# Altium PCB Power.PcbDoc
Units mil, origin at the board's own origin, x right, y up, seen from the top; angles counter-clockwise.
Board outline 1220.47 x 2874.02 mil, 2 copper layers (Top Layer, Bottom Layer), stack 21 mil thick; 48 components, 32 nets, 128 pads, 221 vias.
Unrouted connection lines stored in the file: 51.
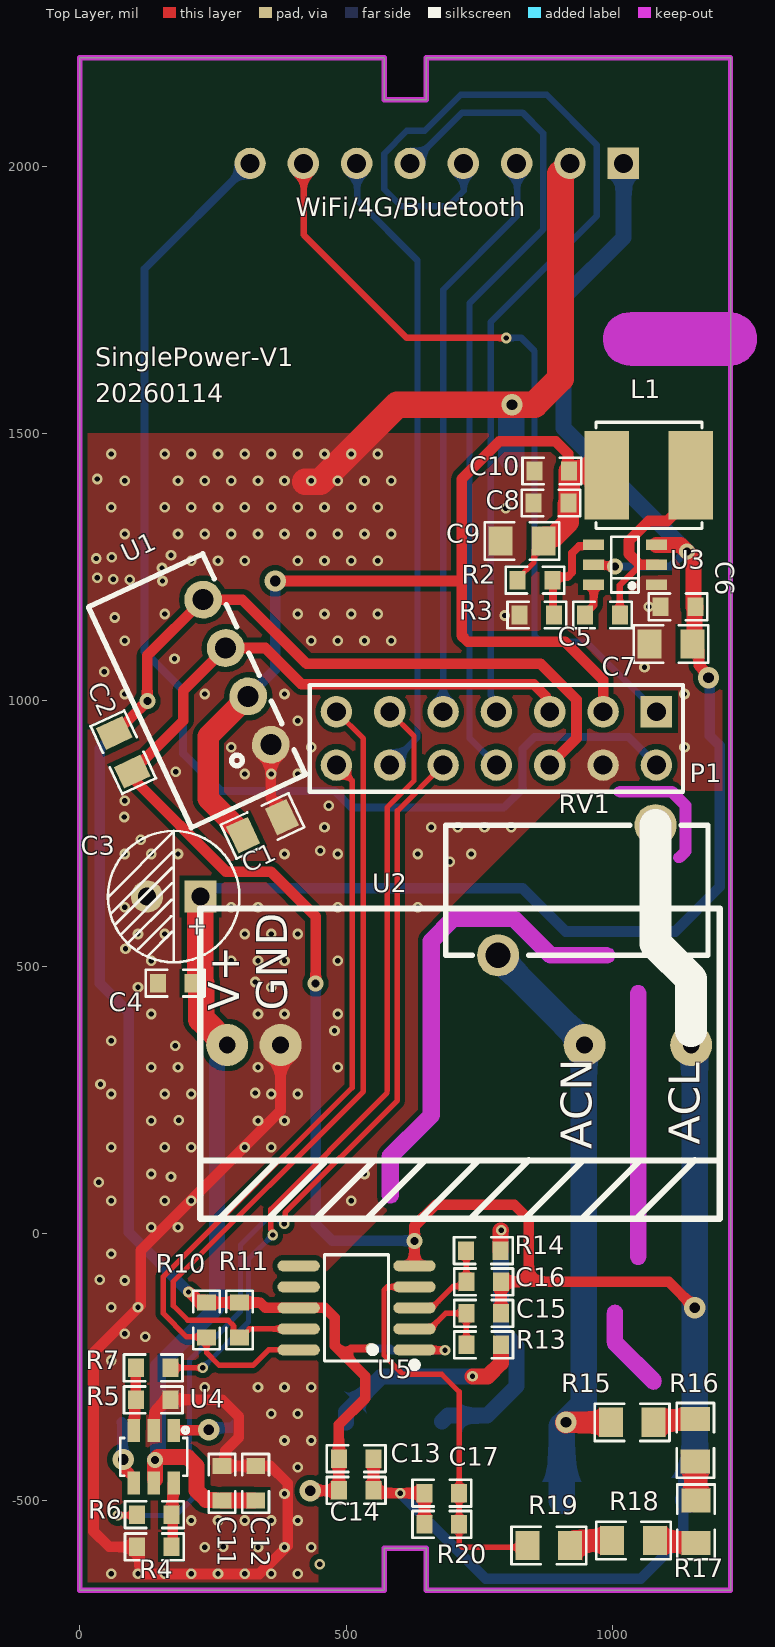
[diagram p0: Top Layer view]
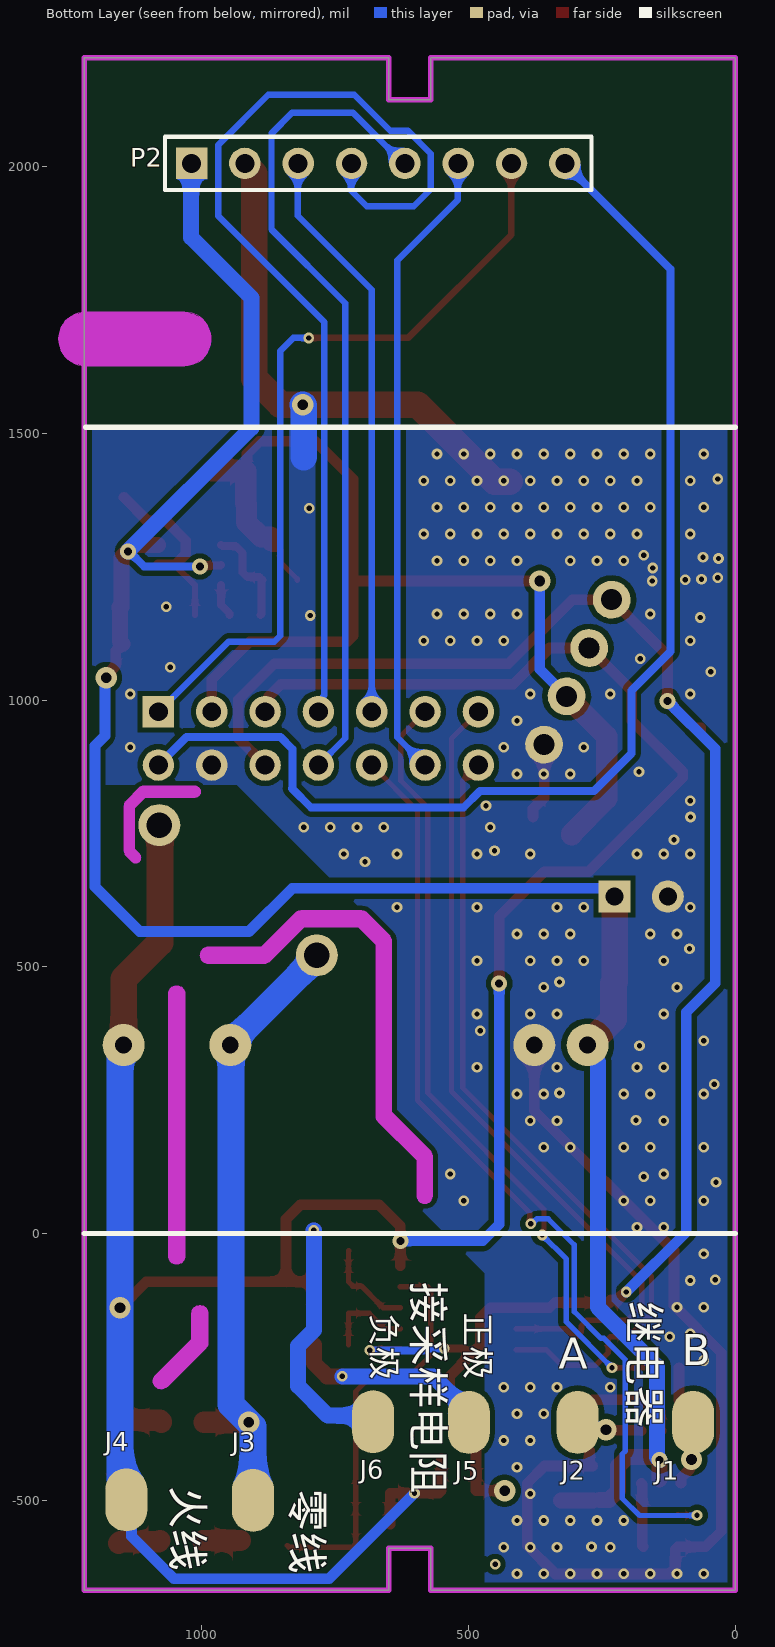
[diagram p1: Bottom Layer view, seen from below]

## Layer stack, top to bottom
Top Solder: solder mask 0.4, Solder Resist, Dk 3.5
Top Layer: signal copper 1.4
Dielectric 2: prepreg 2.8, Composite dielectric, Dk 4.1
Dielectric 1: prepreg 12.6, Composite dielectric, Dk 4.1
Dielectric 3: prepreg 2.8, Composite dielectric, Dk 4.1
Bottom Layer: signal copper 1.4
Bottom Solder: solder mask 0.4, Solder Resist, Dk 3.5

## Board outline
0,-669.29 0,2204.72 570.87,2204.72 570.87,2125.98 649.61,2125.98 649.61,2204.72 1220.47,2204.72 1220.47,-669.29 649.61,-669.29 649.61,-590.55 570.87,-590.55 570.87,-669.29
cut-out: 1032.48,1627.22 cw(c1032.48,1677.23) 1032.48,1727.25 1219.01,1727.25 cw(c1219.01,1677.23) 1269.02,1677.23 cw(c1219.01,1677.23) 1219.01,1627.22
cut-out: 567.17,71.31 567.17,144.13 cw(c582.18,144.13) 571.58,154.76 571.56,154.75 644.25,227.44 644.25,548.67 cw(c659.27,548.67) 648.66,559.3 648.65,559.29 689.62,600.26 689.61,600.25 cw(c700.24,589.64) 700.24,604.66 814.69,604.66 cw(c814.69,589.64) 825.32,600.25 825.31,600.26 889.11,536.46 988.56,536.46 cw(c988.56,521.44) 1003.57,521.44 cw(c988.56,521.44) 988.56,506.43 882.89,506.43 cw(c882.89,521.44) 872.26,510.84 872.28,510.82 808.47,574.63 706.46,574.63 674.28,542.45 674.28,221.22 cw(c659.27,221.22) 669.87,210.59 669.88,210.6 597.19,137.91 597.19,71.31 cw(c582.18,71.31)
cut-out: 1124.18,694.8 cw(c1124.18,704.82) 1118.61,713.14 1126.16,720.68 1126.16,798.25 1106.2,818.21 1012.22,818.21 cw(c1012.22,828.23) 1012.22,838.24 1110.34,838.24 cw(c1110.34,828.23) 1117.43,835.31 1143.25,809.48 cw(c1136.17,802.4) 1146.19,802.4 1146.19,716.53 cw(c1136.17,716.53) 1143.25,709.45 1131.54,697.73 cw(c1124.45,704.82) 1124.45,694.8
cut-out: 1032.29,-43.1 ccw(c1047.3,-43.1) 1062.32,-43.1 1062.32,449.84 ccw(c1047.3,449.84) 1032.29,449.84
cut-out: 988.7,-204.62 ccw(c1003.72,-204.62) 993.11,-215.25 993.1,-215.24 1065.45,-287.59 ccw(c1076.06,-276.97) 1091.08,-276.97 ccw(c1076.06,-276.97) 1086.68,-266.35 1018.73,-198.4 1018.73,-149.81 ccw(c1003.72,-149.81) 988.7,-149.81

## Design rules (kind name [scope] priority, off if disabled: settings)
Clearance "Via to pad" [IsVia vs IsPad] p1: gap=10 ignorepadtopadclearanceinfootprint=FALSE
Clearance Ploy [InPoly] p2: gap=10 ignorepadtopadclearanceinfootprint=FALSE
Clearance "Track to pad" [IsTrack vs IsPad] p3: gap=8 ignorepadtopadclearanceinfootprint=FALSE
Clearance "Track to track" [IsTrack vs IsTrack] p4: gap=5 ignorepadtopadclearanceinfootprint=FALSE
Clearance "Via to Track" [IsVia vs IsTrack] p5: gap=10 ignorepadtopadclearanceinfootprint=FALSE
Clearance "Via To Via" [IsVia vs IsVia] p6: gap=10 ignorepadtopadclearanceinfootprint=FALSE
ComponentClearance [All] p1: gap=0 collisioncheckmode=3 verticalgap=0 showdistances=FALSE
DiffPairsRouting [All] p1: maxlimit=10 minlimit=7 mostfreqgap=7 toplayer_minwidth=5 toplayer_maxwidth=100 toplayer_prefwidth=7 bottomlayer_minwidth=5 bottomlayer_maxwidth=100 bottomlayer_prefwidth=7 maxuncoupledlength=500
HoleSize [All] p1: absolutevalues=TRUE maxlimit=200 minlimit=1 maxpercent=80.000 minpercent=20.000
HoleToHoleClearance [All] p1: gap=5 allowstackedmicrovias=TRUE
MinimumSolderMaskSliver [All] p1: minsoldermaskwidth=0
PolygonConnect [All vs (InPadClass('All Pads'))] p1: connectstyle=Direct reliefconductorwidth=10 reliefentries=4 polygonreliefangle="90 Angle" airgapwidth=10
PolygonConnect GND焊盘 [InNet('GND_1') vs (InPadClass('All Pads'))] p2: connectstyle=Relief reliefconductorwidth=10 reliefentries=4 polygonreliefangle="90 Angle" airgapwidth=10
PolygonConnect GND过孔 [All vs IsVia] p3: connectstyle=Direct reliefconductorwidth=10 reliefentries=4 polygonreliefangle="90 Angle" airgapwidth=10
RoutingVias RoutingVias_1 [InNet('AGND_1')] p1: holewidth=10 width=20 viastyle="Through Hole" minholewidth=10 minwidth=20 maxholewidth=28 maxwidth=50
RoutingVias [All] p2: holewidth=10 width=20 viastyle="Through Hole" minholewidth=10 minwidth=20 maxholewidth=28 maxwidth=50
SilkToSilkClearance [All] p1: silktosilkclearance=0
SilkToSolderMaskClearance [IsPad] p1: minsilkscreentomaskgap=0 clearancetoexposedcopper=TRUE
SolderMaskExpansion [All] p1: expansion=1 istentingtop=FALSE
Width [All] p1: maxlimit=300 minlimit=5 preferedwidth=7 minimp=50.000000 maximp=50.000000 favimp=50.000000
23 further rules are at their usual default settings.

## Classes and differential pairs
component class 连接: P1 P2
component class 继电器: C11 C12 J1 J2 R4 R5 R6 R7 U4
component class Power: C3 C4 C5 C6 C7 C8 C9 C10 L1 R2 R3 U2 U3
component class 计量: C1 C2 C13 C14 C15 C16 C17 J3 J4 J5 J6 R10 R11 R13 R14 R15 R16 R17 R18 R19 R20 U1 U5

## Components (designator, comment, footprint, x,y, rotation, side; value= is the part's Value field where it differs from the comment)
C1 "4.7uF/25V" 0805R 306.58,746.97 r25 top
C2 "10uF/25V" 0805R 64.81,938.5 r295 top
C3 "100uF/25V" CAPPIND06 226.33,631.7 r180 top
C4 "104/25V" 0603R 146.72,469.16 r0 top
C5 "104/25V" 0603R 1012.91,1159.72 r180 top
C6 "10uF/25V" 0603R 1089.61,1174.81 r0 top
C7 "22uF/25V" 0805R 1148.88,1105.36 r180 top
C8 "10uF/25V" 0603R 851.35,1369.54 r0 top
C9 "47uF/10V" 0805R 869.59,1298.28 r180 top
C10 "104/10V" 0603R 852.99,1429.65 r0 top
C11 "22uF/25V" 0603R 266.89,-435.99 r270 top
C12 "104/25V" 0603R 330.17,-435.99 r270 top
C13 "104/25V" 0603R 551.09,-422.5 r180 top
C14 "10uF/25V" 0603R 551.09,-481.76 r180 top
C15 "68nF/10V" 0603R 725.1,-149.81 r0 top
C16 "68nF/10V" 0603R 725.1,-90.67 r0 top
C17 "10nF/10V" 0603R 711.6,-487.03 r180 top
J1 "J1" 贴片焊盘V1（3*2椭圆） 78.74,-354.33 r270 bottom
J2 "J1" 贴片焊盘V1（3*2椭圆） 295.28,-354.33 r270 bottom
J3 "J1" 贴片焊盘V1（3*2椭圆） 904.13,-500.7 r270 bottom
J4 "J1" 贴片焊盘V1（3*2椭圆） 1141.73,-499.72 r270 bottom
J5 "J1" 贴片焊盘V1（3*2椭圆） 499.45,-354.33 r90 bottom locked
J6 "J1" 贴片焊盘V1（3*2椭圆） 679,-353 r270 bottom locked
L1 "4.7uH/3A" 贴片电感5020 1146.16,1421.51 r0 top
P1 "Header 7X2" HDR2X7 1081.52,978.23 r180 top
P2 "Header 8" HDR1X8 1019.45,2006.38 r180 bottom
R2 "40.2K" 0603R 821.36,1225.04 r0 top
R3 "12K" 0603R 889.66,1159.72 r180 top
R4 "4.7K/5%" 0603R 107.46,-587.82 r0 top
R5 "4.7K/5%" 0603R 170.5,-311.98 r180 top
R6 "100R/5%" 0603r 107.45,-527.5 r0 top
R7 "100R/5%" 0603R 105.5,-251.97 r0 top
R10 "2K/5%/0603" 0603R 237.73,-194.78 r90 top
R11 "2K/5%/0603" 0603R 299.83,-194.78 r90 top
R13 "510R/1%" 0603R 790.1,-208.86 r180 top
R14 "510R/1%" 0603R 789.57,-32.38 r180 top
R15 "390K" 0805R 1076.06,-354.33 r180 top
R16 "390K" 0805R 1154.51,-428.09 r90 top
R17 "390K" 0805R 1155.81,-580.7 r90 top
R18 "390K" 0805R 998.58,-575.7 r0 top
R19 "390K" 0805R 839.83,-585.22 r0 top
R20 "510R/1%" 0603R 646.6,-545.57 r0 top
RV1 "7S561K" 10D821K 932.24,643.49 r0 top
U1 "B0303S" B1205S-1WR3 1005.71,-606.96 r115 top
U2 "X1071    90-240V" X1071 1146.8,353.29 r180 top locked
U3 "DIO6930" SOT-23-6DBV 1081.98,1216.31 r90 top
U4 "BL8023FCBT6R" SOT-23-6 176.33,-369.85 r180 top
U5 "BL0942" BL0942-10pin 627.79,-218.29 r90 top

## Footprints (in the part's own frame and the unit in brackets; to place one, negate y for a bottom-side part, rotate by r counter-clockwise, add the part's x,y. Pads: shape width x height; smd on the part's side, far side on the other; paste and mask are expansions set on the pad)
10D821K [mm]
  round 2 hole 1.2 copper offset 0,0: 1(-3.75,-3.1) 2(3.75,3.1)
  silkscreen extent -6.25,-3.1 6.25,3.1
0603R [mil]
  rect 30x35 smd: 1(0,0) 2(65,0)
  silkscreen extent -22,-25 88,25
0603r [mil]
  rect 30x35 smd: 1(0,0) 2(65,0)
  silkscreen extent -22,-25 88,25
0805R [mil]
  rect 45x55 smd: 1(0,0) 2(80,0)
  silkscreen extent -30,-35 110,35
B1205S-1WR3 [mm]
  round 1.8 hole 1: 1(42.019,-1.451) 2(44.559,-1.451) 3(47.099,-1.451) 4(49.639,-1.451)
  silkscreen extent 40.03,-2.35 51.63,3.65
BL0942-10pin [mm]
  oval 0.525x2.014 smd: 1(0,0) 2(1,0) 3(2,0) 4(3,0) 5(4,0) 6(4,5.513) 7(3,5.513) 8(2,5.513) 9(1,5.513) 10(0,5.513)
  silkscreen extent -0.86,-0.15 4.53,4.28
CAPPIND06 [mil]
  rect 60x60 hole 34: 1(0,0)
  round 60 hole 34: 2(100,0)
  silkscreen extent -73,-123 173,123
HDR1X8 [mm] "Connector; Header; 8 Position"
  rect 1.5x1.5 hole 0.9: 1(0,0)
  round 1.5 hole 0.9: 2(2.54,0) 3(5.08,0) 4(7.62,0) 5(10.16,0) 6(12.7,0) 7(15.24,0) 8(17.78,0)
  silkscreen extent -1.27,-1.27 19.05,1.27
HDR2X7 [mm] "Connector; Header; 7x2 Position"
  rect 1.5x1.5 hole 0.9: 1(0,0)
  round 1.5 hole 0.9: 2(0,2.54) 3(2.54,0) 4(2.54,2.54) 5(5.08,0) 6(5.08,2.54) 7(7.62,0) 8(7.62,2.54) 9(10.16,0) 10(10.16,2.54) 11(12.7,0) 12(12.7,2.54) 13(15.24,0) 14(15.24,2.54)
  silkscreen extent -1.27,-1.27 16.51,3.81
SOT-23-6 [mm]
  rect 0.6x1.1 smd: 1(0,0) 2(0.95,0) 3(1.9,0) 4(1.9,2.5) 5(0.95,2.5) 6(0,2.5)
  silkscreen extent -0.69,-0.15 2.55,2.15
SOT-23-6DBV [mm]
  rect 0.5x1 smd: 1(0,0) 2(0.95,0) 3(1.9,0) 4(1.9,3) 5(0.95,3) 6(0,3)
  silkscreen extent -0.37,0.86 2.29,2.16
X1071 [mm]
  round 2 hole 0.8: 1(0,0) 2(5.08,0) 4(19.56,0) 5(22.1,0)
  silkscreen extent -1.36,-6.5 23.38,8.28
贴片焊盘V1（3*2椭圆） [mm]
  oval 3x2 smd: 1(0,0)
贴片电感5020 [mm]
  rect 2.124x4.22 smd: 1(0,0) 2(-4,0)
  silkscreen extent -4.53,-2.53 0.53,2.53

## Part data
C1 C2: library part CAP+
C3 C7 C9: library part "Cap Pol1", "Polarized Capacitor (Radial)", LatestRevisionDate=17-Jul-2002, LatestRevisionNote="Re-released for DXP Platform.", PackageDescription="Polarized Capacitor (Radial); 2 Leads", PackageReference=RB7.6-15, Published=8-Jun-2000, Publisher="Altium Limited"
C4 C5 C10 C11 C12 C13 C14: library part CAP_1
C6 C8 C15 C16 C17: library part CAP
L1: library part Inductor, "Inductor", Code_IEC=1005, Code_JEITA=0402, LatestRevisionDate=29-May-2009, LatestRevisionNote="IPC-7351 Footprint Added.", PackageDescription="Chip Inductor", PackageReference=0402-A, Published=8-Jun-2000, Publisher="Altium Limited"
P1: "Header, 7-Pin, Dual row", LatestRevisionDate=17-Jul-2002, LatestRevisionNote="Re-released for DXP Platform.", Publisher="Altium Limited"
P2: "Header, 8-Pin", LatestRevisionDate=17-Jul-2002, LatestRevisionNote="Re-released for DXP Platform.", Publisher="Altium Limited"
R2 R3: library part Res2, "Resistor", LatestRevisionDate=17-Jul-2002, LatestRevisionNote="Re-released for DXP Platform.", PackageDescription="Axial Device, Thru-Hole; 2 Leads; 0.4 in Pin Spacing", PackageReference=AXIAL-0.4, Published=8-Jun-2000, Publisher="Altium Limited"
R4 R5 R6 R7 R10 R11 R13 R14 R15 R16 R17 R18 R19 R20: library part RES
RV1: library part "Res Varistor", "Varistor (Voltage-Sensitive Resistor)", Code_IPC=RESC2012, LatestRevisionDate=29-May-2009, LatestRevisionNote="IPC-7351 Footprint Added.", PackageDescription="Chip Resistor 0805 Case Size", PackageReference=6-0805, PackageVersion=Mar-2003, Published=24-Mar-1999, Publisher="Altium Limited"
U1: library part B0505S
U2: library part AD2DC_EMC
U3: library part BL8032
U4: library part BL8023HCB6TR, JLCPCB Part Class="Extended Part", LCSC Part Name="BL8023HCB6TR 继电器驱动芯片 停产", Manufacturer=BL(上海贝岭), Add into BOM=yes, Convert to PCB=yes, Datasheet=https://atta.szlcsc.com/upload/public/pdf/source/20190920/C431145_DEC39E836DB2A2F1462A8BB350F12ABB.pdf, Device=BL8023HCB6TR, Manufacturer Part=BL8023HCB6TR, Supplier=LCSC, Supplier Footprint=SOT-23-6, Supplier Part=C431145, Symbol=BL8023HCB6TR
U5: library part BL0942_C2837510, JLCPCB Part Class="Extended Part", LCSC Part Name=BL0942内置时钟免校准计量芯片, Manufacturer=BL(上海贝岭), Add into BOM=yes, Convert to PCB=yes, Datasheet=https://atta.szlcsc.com/upload/public/pdf/source/20220627/BFAD44701CA6DE9A8853C5A4834B6884.pdf, Device=BL0942_C2837510, Manufacturer Part=BL0942, Supplier=LCSC, Supplier Footprint=SSOP-10-150mil, Supplier Part=C2837510, Symbol=BL0942

## Via types
v1: diameter 20, hole 10, Top Layer to Bottom Layer, 207 vias
v2: diameter 40, hole 20, Top Layer to Bottom Layer, 8 vias
v3: diameter 30, hole 15, Top Layer to Bottom Layer, 6 vias

## Nets (pads, with @x,y where several pads share a name; then routed paths per layer and width w, separated by ;. In a path a pad name is that pad's centre, name@x,y a point inside that pad or via, vN(x,y) a via of type N, cw(c..) or ccw(c..) an arc to the next point about the centre after c; other vN are vias at no path point)
4G_MCU_RXD: P1.8 P2.5 | length 1567.2
  Bottom Layer w12: P2.5@620.24,2007.87 623.25,2007.87 717.15,2101.77 830.49,2101.77 869.59,2062.66 869.59,1882.59 730.98,1743.98 730.98,928.77 P1.8
4G_MCU_TXD: P1.7 P2.4 | length 1926.9
  Bottom Layer w12: P2.4@720.24,2007.87 720.24,1955.24 691,1926 602.74,1926 570.87,1957.87 570.87,2024.62 613.62,2067.38 646.86,2067.38 714.48,2135 875.57,2135 969.57,2041.01 969.57,1907.82 770.87,1709.13 770.87,1008.78 772.52,1007.14 772.52,987.23 P1.7
4G_Reset: P1.9 P2.3 | length 1087.1
  Bottom Layer w12: P1.9 681.52,1769.42 820.24,1908.13 P2.3@820.24,2007.87
BL0942_RXD: P1.13 R11.1 U5.9 | length 1555.8
  Top Layer w10: U5.9 318.19,-178.92 302.33,-194.78 298.24,-194.78 288.24,-184.78 288.24,-172.65 278.37,-162.79 202.85,-162.79 175.43,-135.37 175.43,-90.1 532,266.47 532,927.75 P1.13
BL0942_TXD: P1.14 R10.1 U5.10 | length 1508.8
  Top Layer w10: U5.10 354.07,-218.29 324.88,-247.48 261.75,-247.48 237.73,-223.46 237.73,-197.28 234.46,-194.01 200.72,-194.01 157,-150.29 157,-80.8 511,273.2 511,848.75 P1.14
BLE_Control: P1.12 P2.6 | length 1198.1
  Bottom Layer w12: P2.6@520.24,2007.87 520.24,1937.76 633.54,1824.46 633.54,930.24 P1.12
BLE_MCU_RXD: P1.2 P2.8 | length 2271.2
  Top Layer w15: P1.2 P1.2@1081.52,880.52
  Bottom Layer w15: P2.8 121.16,1808.09 121.16,1091.18 194.22,1018.12 194.22,900.07 264.85,829.43 478.76,829.43 509.84,798.35 795,798.35 831.09,834.44 830.49,835.04 830.49,908.49 852.63,930.64 1029.11,930.64 P1.2
BLE_MCU_TXD: P1.1 P2.7 | length 1490.5
  Top Layer w12: P2.7@420.24,2007.87 420.24,1872.31 613.4,1679.14 v1(799.66,1679.14)
  Top Layer w15: P1.1@1073.99,985.76 P1.1
  Bottom Layer w12: v1(799.66,1679.14) 828.48,1679.14 852.99,1654.63 852.99,1120.89 864.3,1109.58 950.17,1109.58 P1.1
GND: C1.2 C3.2 C4.1 C6.1 C7.2 C8.1 C9.2 C10.1 C11.1 C12.1 P1.4 P2.2 R3.2 R4.1 R5.1 U1.1 U2.4 U3.1 U4.2 | length 3298.7
  Top Layer w20: U4.2 140.74,-368.03 140.74,-334.44 155.7,-319.48 165.5,-319.48 170.5,-314.48 R5.1 267.05,-311.98 278.34,-323.27 298.24,-343.17 298.24,-382.54 273.3,-407.48 273.3,-430.99 268.3,-435.99 C11.1 ; C11.1@269.39,-435.99 C12.1 357.67,-435.99 390.02,-468.34 390.02,-585.7 337.02,-638.7 124.17,-638.7 112.46,-626.99 112.46,-592.82 R4.1 55.54,-587.82 26,-558.28 26,-223.53 114.7,-134.84 114.7,-32.13 376.72,229.89 U2.4 ; U1.1@358.35,929.2 U1.1 358.35,817.08 379.08,796.35 C1.2
  Top Layer w50: 423.02,1409.67 451.16,1409.67 595.64,1554.15 852.99,1554.15 901.72,1602.89 901.72,1986.91 920.24,2005.42 P2.2@920.24,2007.87
  Bottom Layer w50: 809.27,1455.97 809.27,1552.62 v2(810.8,1554.15)
  other v1: 59.27,-638.44 109.27,-638.44 159.27,-638.44 209.27,-638.44 259.27,-638.44 309.27,-638.44 359.27,-638.44 409.27,-638.44 234.27,-588.44 334.27,-588.44 384.27,-588.44 434.27,-588.44 269.39,-587.82 209.27,-538.44 259.27,-538.44 309.27,-538.44 359.27,-538.44 409.27,-538.44 384.27,-488.44 409.27,-438.44 384.27,-388.44 434.27,-388.44 359.27,-338.44 409.27,-338.44 234.27,-288.44 334.27,-288.44 384.27,-288.44 434.27,-288.44 59.27,-238.44 123,-194.01 84.27,-188.44 59.27,-138.44 109.27,-138.44 84.27,-88.44 37.39,-87.04 59.27,-38.44 134.27,11.56 184.27,11.56 59.27,61.56 159.27,61.56 209.27,61.56 509.27,61.56 36,96 171.33,106 134.27,111.56 534.27,111.56 59.27,161.56 159.27,161.56 209.27,161.56 309.27,161.56 359.27,161.56 134.27,211.56 186,212 334.27,211.56 384.27,211.56 59.27,261.56 159.27,261.56 209.27,261.56 359.27,261.56 409.27,261.56 329.35,263.2 39.02,279.55 134.27,311.56 184.27,311.56 334.27,311.56 484.27,311.56 179.56,351.95 59.27,361.56 477.88,380 134.27,411.56 334.27,411.56 384.27,411.56 484.27,411.56 109.27,461.56 359.27,461.56 329.35,471.32 134.27,511.56 284.27,511.56 334.27,511.56 384.27,511.56 484.27,511.56 85.84,533.7 109.27,561.56 159.27,561.56 309.27,561.56 359.27,561.56 409.27,561.56 84.27,611.56 284.27,611.56 334.27,611.56 484.27,611.56 634.27,611.56 694.07,696.93 84.27,711.56 134.27,711.56 184.27,711.56 384.27,711.56 484.27,711.56 634.27,711.56 734.27,711.56 451.21,717.45 114.7,738.4 459.27,761.56 659.27,761.56 709.27,761.56 759.27,761.56 809.27,761.56 83.86,780.78 467.37,801.93 84.27,811.56 309.27,861.56 359.27,861.56 409.27,861.56 180.35,866 284.27,911.56 434.27,911.56 1134.27,911.56 409.27,961.56 84.27,1011.56 234.27,1011.56 384.27,1011.56 1134.27,1011.56 46.12,1053.08 1059.27,1061.56 177.8,1077.65 84.27,1111.56 434.27,1111.56 484.27,1111.56 534.27,1111.56 584.27,1111.56 65.83,1155.04 796.87,1158.79 159.27,1161.56 409.27,1161.56 459.27,1161.56 509.27,1161.56 559.27,1161.56 1067.11,1174.81 155.35,1223.45 93.66,1225.42 63.08,1226.96 32.83,1229.62 154.33,1247.7 209.27,1261.56 259.27,1261.56 309.27,1261.56 409.27,1261.56 459.27,1261.56 509.27,1261.56 559.27,1261.56 31.3,1265.56 60.33,1267.9 171.33,1271.78 84.27,1311.56 184.27,1311.56 234.27,1311.56 284.27,1311.56 334.27,1311.56 384.27,1311.56 434.27,1311.56 484.27,1311.56 534.27,1311.56 584.27,1311.56 798.86,1359.75 59.27,1361.56 159.27,1361.56 209.27,1361.56 259.27,1361.56 309.27,1361.56 359.27,1361.56 409.27,1361.56 459.27,1361.56 509.27,1361.56 559.27,1361.56 84.27,1411.56 184.27,1411.56 234.27,1411.56 284.27,1411.56 334.27,1411.56 384.27,1411.56 434.27,1411.56 484.27,1411.56 534.27,1411.56 584.27,1411.56 32.83,1414.74 59.27,1461.56 159.27,1461.56 209.27,1461.56 259.27,1461.56 309.27,1461.56 359.27,1461.56 409.27,1461.56 459.27,1461.56 509.27,1461.56 559.27,1461.56
IN1: C16.1 R14.2 U5.3 | length 176.1
  Top Layer w10: U5.3 659.98,-139.55 665.31,-134.22 665.64,-134.22 700.96,-98.9 716.87,-98.9 C16.1 725.1,-87.04 725.1,-32.91 R14.2
IP1: C15.1 R13.2 U5.2 | length 170.6
  Top Layer w10: U5.2@629.33,-177.38 U5.2 657.09,-178.92 686.21,-149.81 C15.1 R13.2
Lin: C2.2 C13.1 C14.1 C15.2 C16.2 C17.2 J4.1 P1.5 R20.1 RV1.2 U1.3 U2.1 U5.5 | length 5284.8
  Top Layer w20: v3(442.49,468.9) 442.49,594.27 358.27,678.49 274.47,678.49 98.62,854.33 C2.2 194.22,961.59 194.22,1018.12 U1.3 348.14,1097.73 416.01,1029.86 851.73,1029.86 874.05,1007.54 874.05,985.7 P1.5 ; C13.1 C14.1 551.09,-482.03 556.09,-487.03 v1(601.34,-487.03) C17.2 R20.1 ; U5.5 v3(627.79,-13.9) 627.79,13.85 667.95,54 815,54 842.3,26.7 842.3,-90.67 ; C15.2 C16.2 842.3,-90.67 ; v2(1153.56,-139.68) 1104.55,-90.67 842.3,-90.67
  Top Layer w50: RV1.2 1078.56,764.22 1078.56,545.2 1146.8,476.97 U2.1
  Bottom Layer w20: v3(442.49,468.9) 442.49,17 473.39,-13.9 v3(627.79,-13.9) ; v1(601.34,-487.03) 761.74,-647.43 1052.17,-647.43 1131.91,-567.69 J4.1@1131.91,-520.6
  Bottom Layer w50: J4.1 1147.23,-494.22 1147.23,-454.21 1153.56,-447.88 1153.56,338.75 1146.8,345.52 U2.1
NetC5_1: C5.1 L1.1 U3.2 | length 340.3
  Top Layer w12: C5.1 1012.91,1215.23 1047.98,1250.3
  Top Layer w20: U3.2 1081.82,1253.87 1050.08,1253.87 1030.05,1273.9 1030.05,1299.05 1067,1336 1101.91,1336 L1.1@1146.16,1380.25
NetC5_2: C5.2 U3.6 | length 63.2
  Top Layer w15: C5.2 947.91,1162.22 963.87,1178.18 U3.6
NetJ5_1: J5.1 R13.1 | length 382.6
  Top Layer w30: v1(736.56,-268.07) 764.99,-268.07 790.1,-242.96 R13.1
  Bottom Layer w30: J5.1 499.45,-334.65 566.24,-267.86 736.35,-267.86 v1(736.56,-268.07)
NetJ6_1: J6.1 R14.1 | length 511.1
  Top Layer w30: R14.1 789.57,5.15 v1(790.35,5.93)
  Bottom Layer w30: J6.1 690.25,-341.75 763.82,-341.75 819.44,-286.13 819.44,-210.7 790.1,-181.36 790.1,5.68 v1(790.35,5.93)
NetR2_2: R2.2 R3.1 U3.4 | length 192.6
  Top Layer w15: R3.1 888.01,1161.38 888.01,1223.39 R2.2 892.29,1230.97 914.75,1230.97 923.53,1239.76 923.53,1275.64 936.67,1288.77 961.53,1288.77 U3.4
NetR4_2: R4.2 R6.2 U4.6 | length 121.2
  Top Layer w20: R4.2 174.52,-585.76 174.52,-470.08 U4.6
NetR5_2: R5.2 R7.1 U4.3 | length 119.5
  Top Layer w20: U4.3 103.33,-368.03 103.33,-314.14 R5.2 R7.1
NetR15_1: R15.1 R16.2 | length 89
  Top Layer w30: R16.2@1149.05,-351.21 1153.34,-346.92 R16.2
  Top Layer w40: R15.1 1076.06,-352.77 1078.56,-350.27 1149.92,-350.27 R16.2@1153.3,-346.89
NetR16_1: R16.1 R17.2 | length 73.1
  Top Layer w40: R16.1 1155.16,-428.74 1155.16,-500.04 R17.2
NetR17_1: R17.1 R18.2 | length 79.3
  Top Layer w40: R18.2 1081.08,-578.2 1153.31,-578.2 R17.1
NetR18_1: R18.1 R19.2 | length 70.3
  Top Layer w40: R19.2@928.31,-575.69 R18.1
Nin: J3.1 R15.2 RV1.1 U2.2 | length 1190.8
  Top Layer w40: v2@911.91,-354.83 911.75,-354.83 911.26,-354.33 R15.2
  Bottom Layer w50: RV1.1 784.6,518.46 946.8,356.26 U2.2 ; J3.1 904.13,-362.11 945.45,-320.79 U2.2@945.45,351.95
  other v2: 911.91,-354.33
Relay_C_A: P1.11 R7.2 | length 1476.5
  Top Layer w10: R7.2 v1(230.88,-251.97) ; v1(362.04,-2.98) 360.13,-1.07 360.13,6 358.44,7.68 358.44,45.18 576.46,263.2 576.46,268.5 576.6,268.64 576.6,798.35 627,848.75 627,932.75 P1.11
  Bottom Layer w10: v1(230.88,-251.97) 316.72,-166.13 316.72,-48.31 v1(362.04,-2.98)
Relay_C_B: P1.10 R6.1 | length 1800.2
  Top Layer w10: v1(71.49,-528.58) 106.37,-528.58 R6.1 ; v1(383.44,18.04) 385.36,19.95 385.36,39.11 595.64,249.39 595.64,792.34 P1.10
  Bottom Layer w10: v1(71.49,-528.58) 71.91,-529 179.56,-529 211.72,-496.84 211.72,-413.77 205.88,-407.93 205.88,-237.06 246.17,-196.76 251.61,-196.76 301.72,-146.66 301.72,-21.53 350.6,27.36 371.42,27.36 380.74,18.04 v1(383.44,18.04)
Relay_O_A: J1.1 U4.4 | length 123.4
  Top Layer w20: v2(82.01,-424.07) 85.84,-427.9 85.84,-442.74 101.52,-458.43 U4.4
  Bottom Layer w20: J1.1 80.37,-355.96 80.37,-422.44 v2(82.01,-424.07)
Relay_O_B: J2.1 U4.1 | length 125.4
  Top Layer w20: U4.1 177.11,-369.06 241.37,-369.06 v2(242.15,-368.28)
  Bottom Layer w20: v2(242.15,-368.28) 245.98,-364.46 285.15,-364.46 J2.1
VCC12: C3.1 C4.2 C6.2 C7.1 C11.2 C12.2 P2.1 U2.5 U3.3 U3.5 U4.5 | length 4233.3
  Top Layer w15: U3.5 965.45,1252.13 1002.39,1252.13 v3(1003.97,1250.55)
  Top Layer w20: C7.1 1161.38,1092.86 1161.38,1065.31 1179.17,1047.52 v2(1179.17,1042.11)
  Top Layer w30: U4.5@141.52,-461.62 141.52,-424.52 147.2,-418.84 201.84,-418.84 219.42,-436.41 219.42,-482.15 236.99,-499.72 C11.2@254.3,-499.72 ; C11.2 C12.2@326.23,-500.99 ; U3.3 1126.4,1291.12 1150.93,1266.58 C6.2@1150.93,1174.81 ; C7.1 1153.28,1109.76 1153.28,1170.98 1154.61,1172.31 C6.2
  Top Layer w50: C3.1@226.09,631.7 226.09,471.32 228.25,469.16 228.25,401.76 U2.5
  Bottom Layer w15: v3(1003.97,1250.55) 1108.19,1250.55 1136.49,1278.85 v3(1138.67,1278.85)
  Bottom Layer w20: C3.1 242,647.36 830.28,647.36 911.57,566.07 1116.55,566.07 1200.47,649.99 1200.47,914.63 1181.8,933.31 1181.8,1039.48 v2(1179.17,1042.11)
  Bottom Layer w30: v3(141.52,-424.52) 146.72,-419.32 146.72,-249.06 257.69,-138.08 257.69,321.08 276.72,340.1 U2.5 ; P2.1@1020.24,2007.87 1020.24,1867.48 907.02,1754.26 907.02,1510.5 v3(1138.67,1278.85)
VCC33: C1.1 C8.2 C9.1 C10.2 L1.2 P1.3 R2.1 U1.2 | length 2154.7
  Top Layer w10: R2.1 821.36,1227.54 852.09,1258.27 852.09,1280.78 C9.1
  Top Layer w20: v2(366.6,1223.39) 716.17,1223.39 ; 892.68,1485.54 787.36,1485.54 716.17,1414.35 716.17,1223.39 ; 894.61,1483.18 915.6,1462.19 915.6,1432.04 C10.2 ; P1.3 981.52,1038.22 910.16,1109.58 727.89,1109.58 716.17,1121.3 716.17,1223.39
  Top Layer w40: C1.1 306.58,749.38 241.08,814.88 241.08,932.09 U1.2 ; C9.1 869.59,1303.28 872.09,1305.78 888.87,1305.78 916.35,1333.26 916.35,1367.91 917.99,1369.54 C10.2 L1.2@980.53,1429.65
  Bottom Layer w20: U1.2 366.6,1057.61 v2(366.6,1223.39) ; P1.3 P1.3@988.99,985.7
VCC33_G: C2.1 C13.2 C14.2 P1.6 R10.2 R11.2 U1.4 U5.1 U5.8 | length 3432.5
  Top Layer w15: 496.09,-228.58 508.97,-215.7 v1(545.71,-215.7) ; U5.1 628.26,-218.77 684.51,-218.77 v1(684.98,-219.24)
  Top Layer w20: C2.1 64.81,948.33 77.06,948.33 v3(126.83,998.11) 126.83,1083.63 U1.4 305.18,1188.36 425.54,1068 864.3,1068 931.62,1000.68 931.62,928.33 P1.6 ; v1(204.04,-109.74) 205.55,-109.74 220.59,-124.78 232.73,-124.78 R10.2 ; R10.2@235.23,-129.78 R11.2 338.64,-129.78 348.42,-139.55 U5.8 410.86,-139.68 459.49,-139.68 478.07,-158.26 478.07,-210.55 496.09,-228.58 535.31,-267.79 535.31,-309.38 486.09,-358.6 C13.2 ; v2(432.4,-482.57) 432.81,-482.17 485.69,-482.17 C14.2 C13.2
  Bottom Layer w15: v1(545.71,-215.7) 582.18,-215.7 585.71,-219.24 v1(684.98,-219.24)
  Bottom Layer w20: v3(126.83,998.11) 37.39,908.67 37.39,468.9 91.83,414.46 91.83,2.47 v1(204.04,-109.74)
VP: C17.1 R19.1 R20.2 U5.4 | length 769
  Top Layer w10: U5.4 576.6,-100.18 570.74,-106.04 570.74,-228.43 606.66,-264.35 679,-264.35 711.6,-296.95 C17.1 R20.2 711.6,-582.75 717.46,-588.61 836.44,-588.61 R19.1
pads on no net: U5.6 U5.7
copper on no net:
  other v1: 450.2,-620.22

## Polygon pours and split planes (outlines as drawn)
GND on Bottom Layer "NONET_L-01_P-001" (solid, remove dead copper, pour order 1): -332,1511.81 1495,1511.81 1495,856 1480.77,841.77 935.08,841.77 656.13,562.82 656.13,111.67 469.73,-74.72 469.73,-689 280,-878.73 280,-912 -215,-912 -332,-795
GND on Top Layer "NONET_L-01_P-001" (solid, remove dead copper, pour order 2): -353.88,1500.13 1473.12,1500.13 1473.12,844.31 1458.9,830.09 913.2,830.09 634.25,551.14 634.25,99.99 447.86,-86.41 447.86,-700.69 258.12,-890.42 258.12,-923.69 -236.88,-923.69 -353.88,-806.69

## Keep-outs
Keep-Out Layer:
  lines w10: 0,-669.29 0,2204.72 570.87,2204.72 570.87,2125.98 649.61,2125.98 649.61,2204.72 1220.47,2204.72 1220.47,-669.29 649.61,-669.29 649.61,-590.55 570.87,-590.55 570.87,-669.29 0,-669.29
  lines w20: 1012.22,828.23 1110.34,828.23 1136.17,802.4 1136.17,716.53 1124.45,704.82 1124.18,704.82
  lines w30: 582.18,71.31 582.18,144.13 659.27,221.22 659.27,548.67 700.24,589.64 814.69,589.64 882.89,521.44 988.56,521.44 ; 1003.72,-149.81 1003.72,-204.62 1076.06,-276.97 ; 1047.3,-43.1 1047.3,449.84
  lines w100: 1032.48,1677.23 1219.01,1677.23

## Silkscreen, mask and mechanical layers (free items; w line width, h text height)
Top Overlay:
  lines w60: 1079.87,765.53 1079.87,543.89 1146.8,476.97 1146.8,380
  text "WiFi/4G/Bluetooth" at 405.35,1895.46 h60
  text "SinglePower-V1" at 28.99,1613.91 h60
  text "20260114" at 28.99,1546.3 h60
Bottom Overlay:
  lines w10: 0,0 1220.47,0 ; 0,1511.81 1218,1511.81
  text "接采样电阻" at 622.46,-89.44 h100 r90
  text "继电器" at 217.31,-126.68 h100 r90
  text "正极" at 518.92,-148.35 h78.74 r90
  text "负极" at 694.62,-149.81 h78.74 r90
  text "B" at 100.5,-266.51 h100
  text "A" at 276.72,-273.44 h100
  text "火线" at 1073.38,-473.84 h100 r90
  text "零线" at 849.38,-480.09 h100 r90

## Text inside footprints (layer, text, board x,y; h text height)
C3: Top Overlay "+" at 240.33,602.7 h60 r180
U2: Top Overlay "ACL" at 1182.54,166.71 h100 r90; Top Overlay "ACN" at 979.66,157.71 h100 r90; Top Overlay "V+" at 319.34,417.2 h100 r90; Top Overlay "GND" at 409.34,417.2 h100 r90